# Altium PCB drv8305_instaspin_driver.PcbDoc
Units mm, origin at the board's own origin, x right, y up, seen from the top; angles counter-clockwise.
Board outline 46 x 25 mm, 2 copper layers (Top Layer, Bottom Layer), stack 1.571 mm thick; 95 components, 87 nets, 391 pads, 181 vias.
Unrouted connection lines stored in the file: 1.
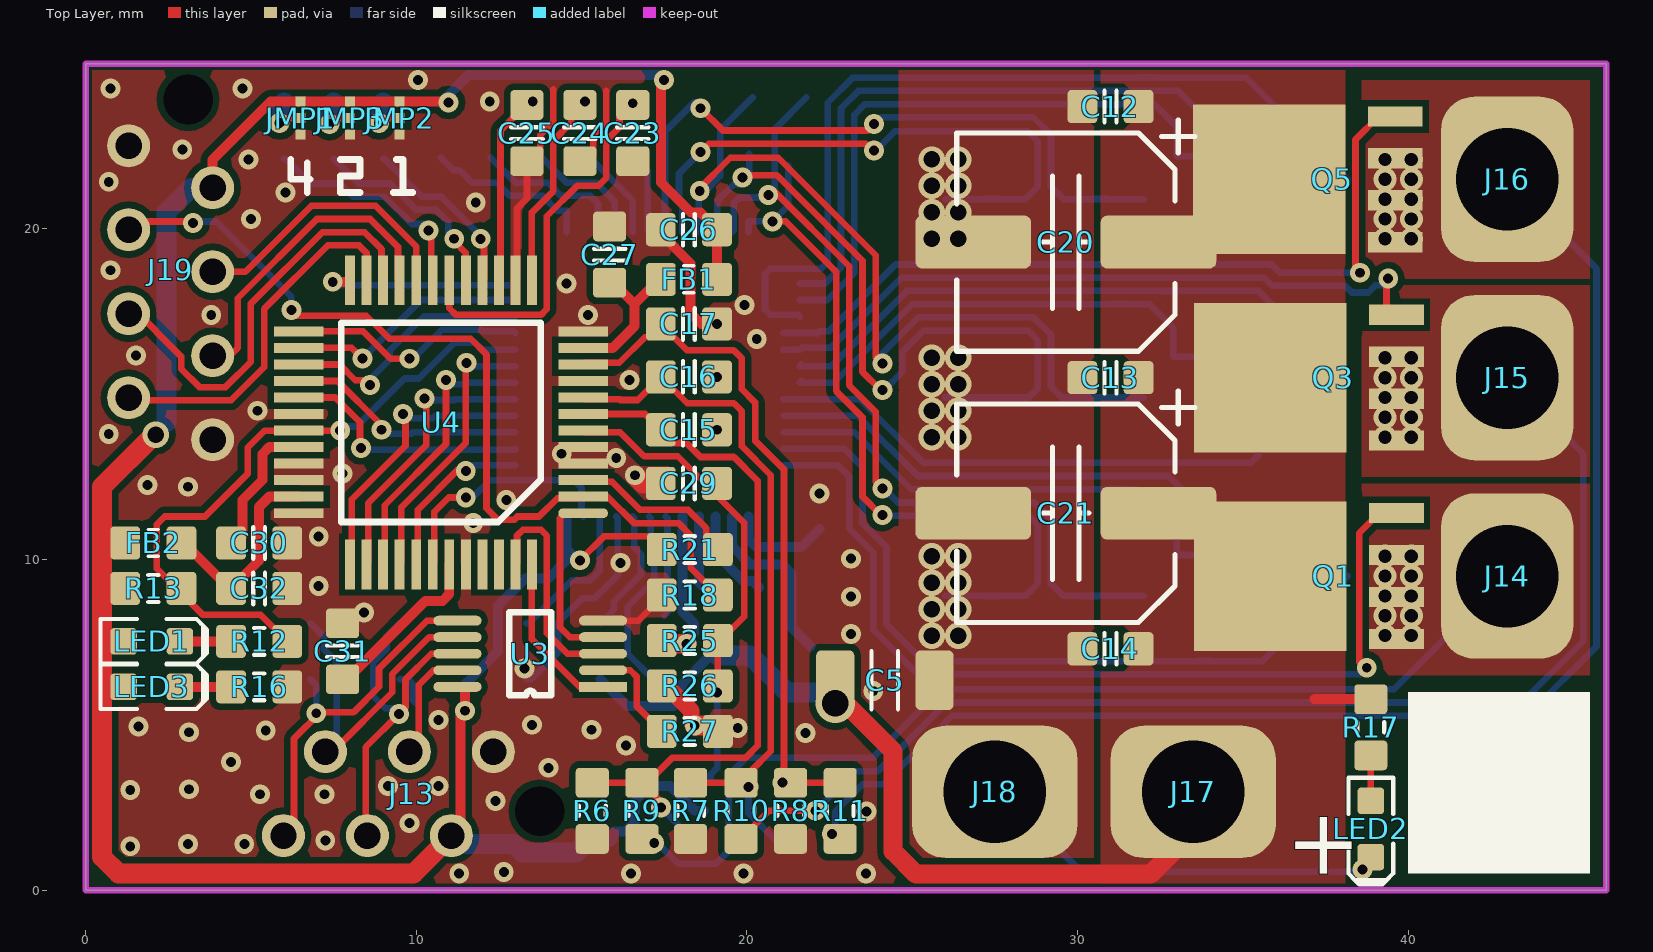
[diagram p0: Top Layer view]
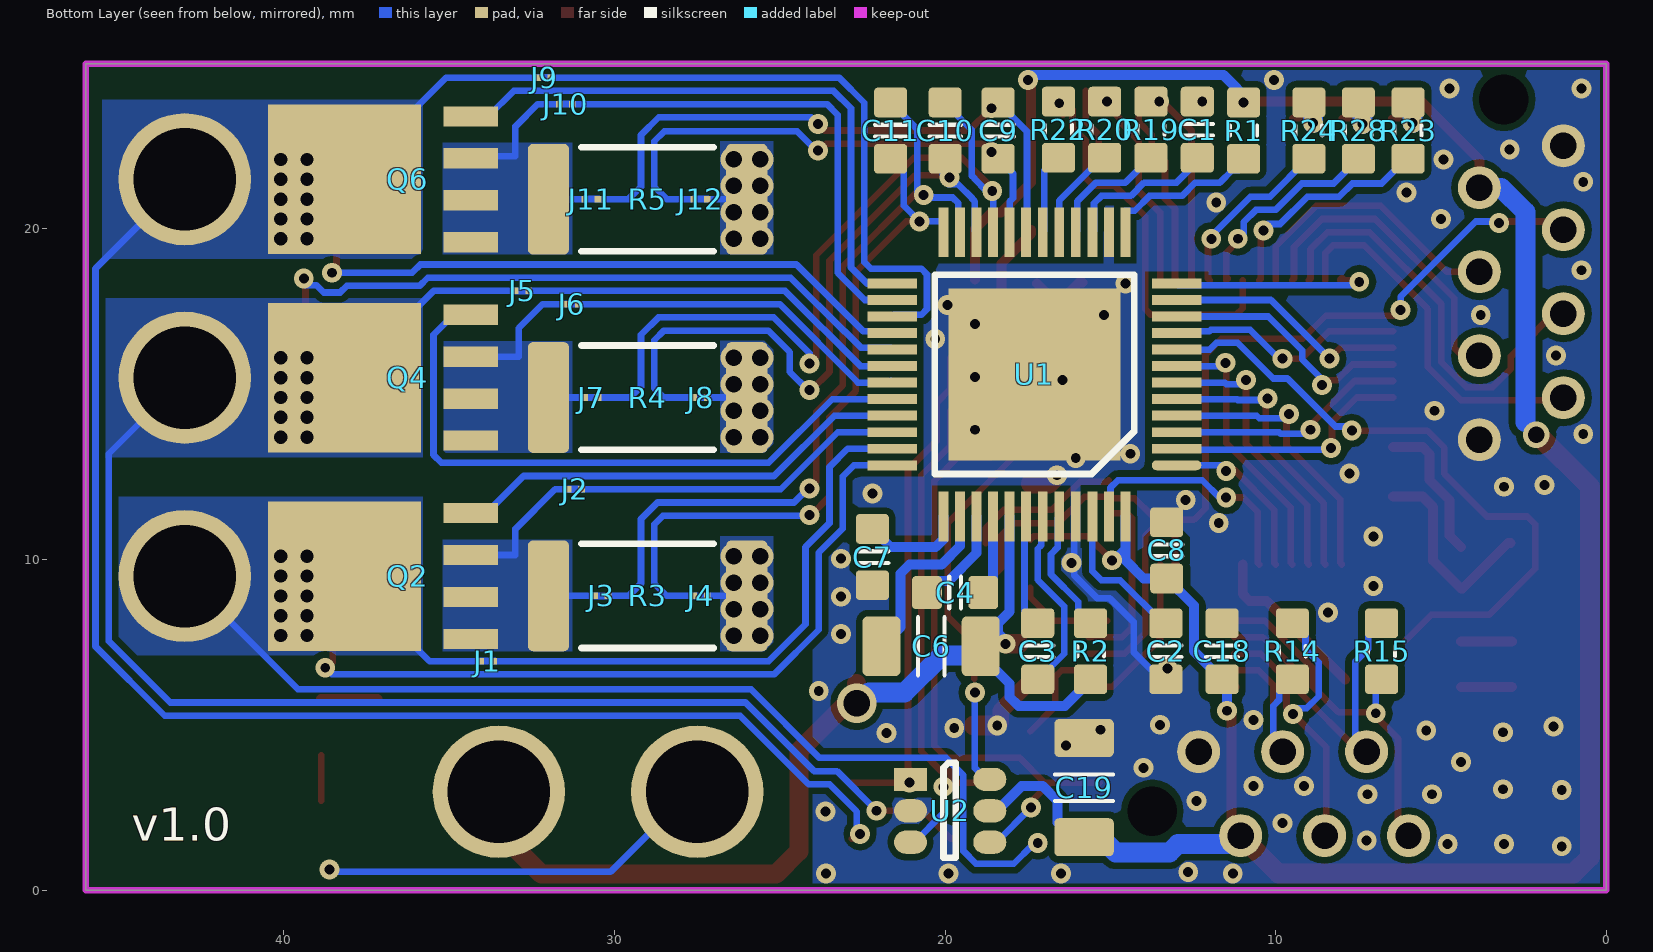
[diagram p1: Bottom Layer view, seen from below]

## Layer stack, top to bottom
Top Solder: solder mask 0.0102, Solder Resist, Dk 3.5
Top Layer: signal copper 0.0356
Dielectric 1: dielectric 1.5, FR-4, Dk 4.8
Bottom Layer: signal copper 0.0356
Bottom Solder: solder mask 0.0102, Solder Resist, Dk 3.5

## Board outline
0,0 46,0 46,25 0,25

## Design rules (kind name [scope] priority, off if disabled: settings)
Clearance ClearanceKeepOut [All vs OnLayer('Keep-Out Layer')] p1: gap=0.1 ignorepadtopadclearanceinfootprint=FALSE
Clearance [All] p2: gap=0.2 ignorepadtopadclearanceinfootprint=FALSE
ComponentClearance NetTieClearance [HasFootprint('NET-TIE-0602')] p1: gap=0 collisioncheckmode=3 verticalgap=0 showdistances=FALSE
ComponentClearance [All] p2: gap=0.2 collisioncheckmode=3 verticalgap=0.2 showdistances=FALSE
DiffPairsRouting [All] p1: maxlimit=0.3 minlimit=0.2 mostfreqgap=0.2 toplayer_minwidth=0.2 toplayer_maxwidth=1 toplayer_prefwidth=0.3 bottomlayer_minwidth=0.2 bottomlayer_maxwidth=1 bottomlayer_prefwidth=0.3 maxuncoupledlength=12.7
HoleSize [All] p1: absolutevalues=TRUE maxlimit=5 minlimit=0.3 maxpercent=80.000 minpercent=20.000
HoleToHoleClearance [All] p1: gap=0.2 allowstackedmicrovias=TRUE
MinimumSolderMaskSliver [All] p1: minsoldermaskwidth=0.2
PolygonConnect DirectConnectPolygons [All vs IsNamedPolygon('Power 16V') or IsNamedPolygon('Power GND') or IsNamedPolygon('Driver 16V') or InNet('SL_A') or InNet('SL_B') or InNet('SL_C') or InNet('MOT_A') or InNet('MOT_B') or InNet('MOT_C') or InNet('BAT_GND') or InNet('16V') or InNet('SLA_SHUNT') or InNet('SLB_SHUNT') or InNet('SLC_SHUNT')] p1: connectstyle=Direct reliefconductorwidth=0.254 reliefentries=4 polygonreliefangle="90 Angle" airgapwidth=0.254
PolygonConnect [All] p2: connectstyle=Relief reliefconductorwidth=0.254 reliefentries=4 polygonreliefangle="90 Angle" airgapwidth=0.254
RoomDefinition drv8305_instaspin_driver [InComponentClass('drv8305_instaspin_driver')] p1: confinementstyle=ConfineIn formatcopy=TRUE lockcomponents=FALSE outline -26,-25.5 75.3,-25.5 75.3,42.2 -26,42.2
RoutingVias [All] p1: holewidth=0.3 width=0.6 viastyle="Through Hole" minholewidth=0.3 minwidth=0.6 maxholewidth=2 maxwidth=3
SolderMaskExpansion SolderMaskExpansionVia [IsVia And (Not IsTestpoint)] p1: expansion=-5
SolderMaskExpansion [All] p2: expansion=0.1
Width [All] p1: maxlimit=5 minlimit=0.2 preferedwidth=0.2 minimp=50.000000 maximp=50.000000 favimp=50.000000
25 further rules are at their usual default settings.

## Classes and differential pairs
differential pair A_ISENSE: +A_ISENSE_P -A_ISENSE_N
differential pair B_ISENSE: +B_ISENSE_P -B_ISENSE_N
differential pair C_ISENSE: +C_ISENSE_P -C_ISENSE_N

## Components (designator, comment, footprint, x,y, rotation, side; value= is the part's Value field where it differs from the comment)
C1 "1u" CAPC1608X90N 12.375,23 r270 bottom value=1µ
C2 "1u" CAPC1608X90N 13.325,7.225 r90 bottom value=1µ
C3 "47n 50V" CAPC1608X90N 17.2,7.225 r90 bottom value=1µ
C4 "47n 50V" CAPC1608X90N 19.7,9 r180 bottom value=1µ
C5 "4.7u" CAPC3216X180N 24.175,6.35 r180 top value=47u
C6 "2.2u" CAPC3216X180N 20.425,7.375 r180 bottom value=47u
C7 "1u" CAPC1608X90N 22.2,10.075 r90 bottom value=1µ
C8 "1u" CAPC1608X90N 13.3,10.275 r270 bottom value=1µ
C9 "1n" CAPC1608X90N 18.4,22.975 r270 bottom value=1µ
C10 "1n" CAPC1608X90N 20,22.975 r270 bottom value=1µ
C11 "1n" CAPC1608X90N 21.65,22.975 r270 bottom value=1µ
C12 "1u" CAPC1608X90N 31,23.7 r180 top value=1µ
C13 "1u" CAPC1608X90N 31,15.5 r180 top value=1µ
C14 "1u" CAPC1608X90N 31,7.3 r180 top value=1µ
C15 "100n" CAPC1608X90N 18.25,13.925 r0 top value=1µ
C16 "100n" CAPC1608X90N 18.25,15.525 r0 top value=1µ
C17 "100n" CAPC1608X90N 18.25,17.125 r0 top value=1µ
C18 "100n" CAPC1608X90N 11.625,7.225 r90 bottom value=1µ
C19 "10u" CAPC3216X180N 15.8,3.1 r90 bottom value=1µ
C20 "220µ" CAP_ELEC_6.3x4.2 29.65,19.6 r0 top
C21 "220µ" CAP_ELEC_6.3x4.2 29.65,11.4 r0 top
C23 "2.2n" CAPC1608X90N 16.55,22.9 r270 top value=1µ
C24 "2.2n" CAPC1608X90N 14.95,22.9 r270 top value=1µ
C25 "2.2n" CAPC1608X90N 13.35,22.9 r270 top value=1µ
C26 "2.2u" CAPC1608X90N 18.25,19.975 r0 top value=1µ
C27 "2.2u" CAPC1608X90N 15.85,19.225 r90 top value=1µ
C29 "100n" CAPC1608X90N 18.25,12.3 r180 top value=1µ
C30 "2.2u" CAPC1608X90N 5.25,10.5 r0 top value=1µ
C31 "2.2u" CAPC1608X90N 7.775,7.225 r90 top value=1µ
C32 "2.2u" CAPC1608X90N 5.25,9.125 r0 top value=1µ
FB1 "220ohm" INDC1608N 18.25,18.475 r0 top value="120R @ 100 MHz"
FB2 "60ohm" INDC1608N 2.05,10.5 r180 top value="120R @ 100 MHz"
J1 "Net-Tie" NET-TIE-0602 33.85,6.925 r0 bottom net-tie
J2 "Net-Tie" NET-TIE-0602 31.2,12.125 r0 bottom net-tie
J3 "Net-Tie" NET-TIE-0602 30.4,8.9 r0 bottom net-tie
J4 "Net-Tie" NET-TIE-0602 27.4,8.9 r180 bottom net-tie
J5 "Net-Tie" NET-TIE-0602 32.8,18.125 r0 bottom net-tie
J6 "Net-Tie" NET-TIE-0602 31.3,17.725 r0 bottom net-tie
J7 "Net-Tie" NET-TIE-0602 30.7,14.9 r0 bottom net-tie
J8 "Net-Tie" NET-TIE-0602 27.4,14.9 r180 bottom net-tie
J9 "Net-Tie" NET-TIE-0602 32.125,24.575 r0 bottom net-tie
J10 "Net-Tie" NET-TIE-0602 31.475,23.775 r0 bottom net-tie
J11 "Net-Tie" NET-TIE-0602 30.7,20.9 r0 bottom net-tie
J12 "Net-Tie" NET-TIE-0602 27.4,20.9 r180 bottom net-tie
J13 "RS485" MICRO-MATCH-6 12.335,4.19 r0 top
J14 "HEADER-1" 2MM-BANANA-VIA-BOTTOM-PAD 43,9.5 r270 bottom
J15 "HEADER-1" 2MM-BANANA-VIA-BOTTOM-PAD 43,15.5 r270 bottom
J16 "HEADER-1" 2MM-BANANA-VIA-BOTTOM-PAD 43,21.5 r270 bottom
J17 "HEADER-1" 2MM-BANANA-VIA-BOTTOM-PAD 33.5,2.975 r180 bottom
J18 "HEADER-1" 2MM-BANANA-VIA-BOTTOM-PAD 27.5,2.975 r180 bottom
J19 "JTAG" MICRO-MATCH-8 1.3,22.515 r90 top
JMP1 "JUMPER" JUMPER-SMD-3WAY-0303 6.5,23.35 r90 top
JMP2 "JUMPER" JUMPER-SMD-3WAY-0303 9.5,23.35 r90 top
JMP3 "JUMPER" JUMPER-SMD-3WAY-0303 8,23.35 r90 top
LED1 "LED Orange" LED-0603-GREEN 2,7.525 r0 top
LED2 "LED White" LED-0603-GREEN 38.875,1.85 r270 top
LED3 "LED White" LED-0603-GREEN 2,6.15 r0 top
Q1 "MOSFET-N" SOT669 37,9.5 r180 top
Q2 "MOSFET-N" SOT669 37,9.5 r0 bottom
Q3 "MOSFET-N" SOT669 37,15.5 r180 top
Q4 "MOSFET-N" SOT669 37,15.5 r0 bottom
Q5 "MOSFET-N" SOT669 36.968,21.5 r180 top
Q6 "MOSFET-N" SOT669 37,21.5 r0 bottom
R1 "10k" RESC1608X55N 10.975,22.975 r270 bottom value=1K5
R2 "100R" RESC1608X55N 15.6,7.225 r270 bottom value=1K5
R3 "0.01R" RESC6332X70N 29,8.9 r180 bottom value=3K3
R4 "0.01R" RESC6332X70N 29,14.9 r180 bottom value=3K3
R5 "0.01R" RESC6332X70N 29,20.9 r180 bottom value=3K3
R6 "4.99k" RESC1608X55N 15.325,2.4 r90 top value=1K5
R7 "4.99k" RESC1608X55N 18.3,2.4 r90 top value=1K5
R8 "4.99k" RESC1608X55N 21.325,2.4 r90 top value=1K5
R9 "34.8k" RESC1608X55N 16.825,2.4 r270 top value=1K5
R10 "34.8k" RESC1608X55N 19.825,2.4 r270 top value=1K5
R11 "34.8k" RESC1608X55N 22.825,2.4 r270 top value=1K5
R12 "1k" RESC1608X55N 5.25,7.525 r0 top value=1K5
R13 "10k" RESC1608X55N 2.05,9.125 r0 top value=1K5
R14 "120R" RESC1608X55N 9.5,7.225 r90 bottom value=1K5
R15 "120R" RESC1608X55N 6.8,7.225 r270 bottom value=1K5
R16 "330R" RESC1608X55N 5.25,6.15 r180 top value=1K5
R17 "10k" RESC1608X55N 38.875,4.925 r90 top value=1K5
R18 "2.2k" RESC1608X55N 18.275,8.925 r0 top value=1K5
R19 "56R" RESC1608X55N 13.775,23 r270 bottom value=1K5
R20 "56R" RESC1608X55N 15.175,23 r270 bottom value=1K5
R21 "2.2k" RESC1608X55N 18.275,10.3 r180 top value=1K5
R22 "56R" RESC1608X55N 16.575,23 r270 bottom value=1K5
R23 "10k" RESC1608X55N 6,22.975 r270 bottom value=1K5
R24 "10k" RESC1608X55N 9,22.975 r270 bottom value=1K5
R25 "34.8k" RESC1608X55N 18.275,7.55 r180 top value=1K5
R26 "4.99k" RESC1608X55N 18.275,6.175 r0 top value=1K5
R27 "10k" RESC1608X55N 18.275,4.8 r0 top value=1K5
R28 "10k" RESC1608X55N 7.5,22.975 r270 bottom value=1K5
U1 "DRV8305N" PQFP48_PAD 13,12.85 r0 bottom
U2 "NUP4201MR6" TSOP-6 21.05,3.35 r180 bottom
U3 "SN65HVD73" SOP10 15.65,6.15 r180 top
U4 "TMS320F28027F" PQFP48 15.05,11.4 r180 top locked

## Footprints (in the part's own frame and the unit in brackets; to place one, negate y for a bottom-side part, rotate by r counter-clockwise, add the part's x,y. Pads: shape width x height; smd on the part's side, far side on the other; paste and mask are expansions set on the pad)
2MM-BANANA-VIA-BOTTOM-PAD [mm]
  rrect50% 5x4 smd far side: 1(0,0)
  round 4 hole 3.1: 1(0,0)
  body extent -2,-2 2,2, height 1.51
CAP_ELEC_6.3x4.2 [mm] "Capacitor, polarized, aluminum can; 6.3x4.2mm DxH"
  round 0.508 on Mech15: 0(0,0)
  rrect25% 3.5x1.6 smd: 1(2.8,0) 2(-2.8,0)
  silkscreen extent -3.3,-3.3 3.9,3.7, body extent -3.3,-3.3 3.3,3.3, height 4.23
CAPC1608X90N [mm] "Chip Capacitor, Body 1.6x0.8mm, EIA 0603, IPC Medium Density"
  round 0.254 on Mech15: 0(0,0)
  rrect25% 0.9x1 smd: 1(-0.85,0) 2(0.85,0)
  Top Layer pour cut-out: -0.6,0.5 -0.4,0.7 0.4,0.7 0.6,0.5 0.6,-0.5 0.4,-0.7 -0.4,-0.7 -0.6,-0.5
  silkscreen extent -0.18,-0.48 0.18,0.48, body extent -0.85,-0.45 0.85,0.45, height 0.89
CAPC3216X180N [mm] "Chip Capacitor, Body 3.2x1.6mm, 1.8mm H, EIA 1206, IPC Medium Density"
  round 0.508 on Mech15: 0(0,0)
  rrect25% 1.15x1.8 smd: 1(-1.5,0) 2(1.5,0)
  silkscreen extent -0.4,-0.88 0.4,0.88, body extent -1.7,-0.9 1.7,0.9, height 1.8
INDC1608N [mm] "Chip bead, Body 1.6x0.8mm, 0603, IPC Medium Density"
  round 0.254 on Mech15: 0(0,0)
  rrect25% 0.9x1 smd: 1(-0.85,0) 2(0.85,0)
  Top Layer pour cut-out: -0.4,0.6 0.4,0.6 0.4,-0.6 -0.4,-0.6
  silkscreen extent -0.15,-0.41 0.15,0.41, body extent -0.8,-0.4 0.8,0.4, height 0.79
JUMPER-SMD-3WAY-0303 [mm]
  rect 0.3x0.3 smd: 1(-0.5,0) 2(0,0) 3(0.5,0)
LED-0603-GREEN [mm]
  round 0.254 on Mech15: 0(0,0)
  rrect25% 0.8x0.8 smd: A(-0.85,0) K(0.85,0)
  Top Layer pour cut-out: -0.5,0.5 0.5,0.5 0.5,-0.5 -0.5,-0.5
  silkscreen extent -1.55,-0.67 1.68,0.67, body extent -0.8,-0.4 0.8,0.4, height 0.75
MICRO-MATCH-6 [mm]
  round 1.3 hole 0.8: 1(0,0) 2(-1.27,-2.54) 3(-2.54,0) 4(-3.81,-2.54) 5(-5.08,0) 6(-6.35,-2.54)
  round 0 hole 1.5 unplated: drill(1.4,-1.8)
  body extent -7.95,-3.77 1.6,1.23, height 4
MICRO-MATCH-8 [mm]
  round 1.3 hole 0.8: 1(0,0) 2(-1.27,-2.54) 3(-2.54,0) 4(-3.81,-2.54) 5(-5.08,0) 6(-6.35,-2.54) 7(-7.62,0) 8(-8.89,-2.54)
  round 0 hole 1.5 unplated: drill(1.4,-1.8)
  body extent -10.49,-3.77 1.6,1.23, height 4
NET-TIE-0602 [mm]
  rect 0.2x0.2 smd paste-0.15 mask-0.15: 1(-0.2,0) 2(0.2,0)
  Top Layer region: -0.25,-0.1 -0.25,0.1 0.25,0.1 0.25,-0.1
PQFP48 [mm]
  oval 1.5x0.3 smd: 1(0,0)
  rect 1.5x0.3 smd: 2(0,-0.5) 3(0,-1) 4(0,-1.5) 5(0,-2) 6(0,-2.5) 7(0,-3) 8(0,-3.5) 9(0,-4) 10(0,-4.5) 11(0,-5) 12(0,-5.5) 25(8.6,-5.5) 26(8.6,-5) 27(8.6,-4.5) 28(8.6,-4) 29(8.6,-3.5) 30(8.6,-3) 31(8.6,-2.5) 32(8.6,-2) 33(8.6,-1.5) 34(8.6,-1) 35(8.6,-0.5) 36(8.6,0)
  rect 0.3x1.5 smd: 13(1.55,-7.05) 14(2.05,-7.05) 15(2.55,-7.05) 16(3.05,-7.05) 17(3.55,-7.05) 18(4.05,-7.05) 19(4.55,-7.05) 20(5.05,-7.05) 21(5.55,-7.05) 22(6.05,-7.05) 23(6.55,-7.05) 24(7.05,-7.05) 37(7.05,1.55) 38(6.55,1.55) 39(6.05,1.55) 40(5.55,1.55) 41(5.05,1.55) 42(4.55,1.55) 43(4.05,1.55) 44(3.55,1.55) 45(3.05,1.55) 46(2.55,1.55) 47(2.05,1.55) 48(1.55,1.55)
  silkscreen extent 1.28,-5.76 7.31,0.27, body extent -0.27,-7.32 8.87,1.82, height 1.62
PQFP48_PAD [mm]
  oval 1.5x0.3 smd: 1(0,0)
  rect 1.5x0.3 smd: 2(0,-0.5) 3(0,-1) 4(0,-1.5) 5(0,-2) 6(0,-2.5) 7(0,-3) 8(0,-3.5) 9(0,-4) 10(0,-4.5) 11(0,-5) 12(0,-5.5) 25(8.6,-5.5) 26(8.6,-5) 27(8.6,-4.5) 28(8.6,-4) 29(8.6,-3.5) 30(8.6,-3) 31(8.6,-2.5) 32(8.6,-2) 33(8.6,-1.5) 34(8.6,-1) 35(8.6,-0.5) 36(8.6,0)
  rect 0.3x1.5 smd: 13(1.55,-7.05) 14(2.05,-7.05) 15(2.55,-7.05) 16(3.05,-7.05) 17(3.55,-7.05) 18(4.05,-7.05) 19(4.55,-7.05) 20(5.05,-7.05) 21(5.55,-7.05) 22(6.05,-7.05) 23(6.55,-7.05) 24(7.05,-7.05) 37(7.05,1.55) 38(6.55,1.55) 39(6.05,1.55) 40(5.55,1.55) 41(5.05,1.55) 42(4.55,1.55) 43(4.05,1.55) 44(3.55,1.55) 45(3.05,1.55) 46(2.55,1.55) 47(2.05,1.55) 48(1.55,1.55)
  rect 5.2x5.2 smd: 49(4.3,-2.75)
  silkscreen extent 1.28,-5.76 7.31,0.27, body extent -0.27,-7.33 8.87,1.82, height 1.62
RESC1608X55N [mm] "Chip Resistor, Body 1.6x0.8mm, EIA 0603, IPC Medium Density"
  round 0.254 on Mech15: 0(0,0)
  rrect25% 0.9x1 smd: 1(-0.85,0) 2(0.85,0)
  Top Layer pour cut-out: -0.6,0.5 -0.4,0.7 0.4,0.7 0.6,0.5 0.6,-0.5 0.4,-0.7 -0.4,-0.7 -0.6,-0.5
  silkscreen extent -0.15,-0.41 0.15,0.41, body extent -0.87,-0.47 0.88,0.48, height 0.54
RESC6332X70N [mm] "Chip Resistor, Body 6.3x3.2mm, 2512, IPC Medium Density"
  round 1 on Mech15: 0(0,0)
  rrect25% 1.25x3.35 smd: 1(-3,0) 2(3,0)
  silkscreen extent -2,-1.58 2,1.58, body extent -3.3,-1.7 3.3,1.7, height 0.69
SOP10 [mm]
  rect 1.45x0.3 smd: 1(0,0)
  oval 1.45x0.3 smd: 2(0,-0.5) 3(0,-1) 4(0,-1.5) 5(0,-2) 6(4.4,-2) 7(4.4,-1.5) 8(4.4,-1) 9(4.4,-0.5) 10(4.4,0)
  silkscreen extent 1.56,-2.25 2.84,0.25, body extent -0.27,-2.5 4.63,0.5, height 1.15
SOT669 [mil]
  rect 182x178 smd: D(46,0)
  rect 65x24 smd: G(-104.33,-75) S(-104.33,75) S(-104.33,-25) S(-104.33,25)
  body extent -125,-99 135,97, height 43
TSOP-6 [mm]
  rect 1x0.7 smd: 1(0,0)
  oval 1x0.7 smd: 2(0,-0.95) 3(0,-1.9) 4(2.4,-1.9) 5(2.4,-0.95) 6(2.4,0)
  silkscreen extent 1,-2.38 1.38,0.5, body extent -0.12,-2.45 2.58,0.55, height 1

## Part data
C1 C2 C3 C4 C7 C8 C9 C10 C11 C12 C13 C14 C15 C16 C17 C18 C19 C23 C24 C25 C26 C27 C29 C30 C31 C32: library part CAPC_1u_0603_X7R_16V_10%, "Capacitor SMD Cer 1uF 10% 16V X7R 0603", Manufacturer 1="TDK Corporation", Manufacturer Part Number 1=C1608X7R1C105K, Package / Case="0603 (1608 metric)", Ratings="16V; X7R", Supplier Part Number 1=445-1604-1-ND, Tolerance=±10%, ComponentLink1Description=http://product.tdk.com/capacitor/mlcc/en/documents/mlcc_commercial_general_en.pdf, ComponentLink1URL=http://product.tdk.com/capacitor/mlcc/en/documents/mlcc_commercial_general_en.pdf, Material=ceramic, SCDType=spec, Supplier 1=Digi-Key
C5 C6: library part CAPC_6n8_1206_NP0_50V, "Capacitor SMD Cer 6.8nF 5% 50V NP0 1206", Manufacturer 1="TDK Corporation", Manufacturer Part Number 1=C3216C0G1H682J/0.60, Package / Case="1206 (3216 metric)", Ratings="50V; NP0", Supplier Part Number 1=445-4005-1-ND, Tolerance=±5%, Material="Ceramic NP0", SCDType=spec, Supplier 1=Digi-Key
C20 C21: library part CAPE_470u_16V_THT, "Capacitor THT Alum Elec 470uF 20% 16V", Manufacturer 1=NICHICON, Manufacturer 2=JD, Manufacturer Part Number 1=UHM1C471MPD6, Manufacturer Part Number 2=GT470UF16V_10x12mm, Package / Case=Radial, Ratings="16V; 105°C", Supplier Part Number 1=54K8151, Tolerance=±20%, Material="Al Electrolytic", SCDType=undef, Supplier 1=Newark
FB1 FB2: library part FERRITE_120R-100MHz_0603, "Ferrite bead 120 Ohm at 100 MHz 2A 0603 SMD", Current=900mA, Current Rating=2A, DC Resistance (DCR)="172.9 mOhm Max", Frequency - Self Resonant=23MHz, Frequency - Test=100kHz, Impedance @ Frequency="120 Ohm @ 100MHz", Manufacturer 1="Murata Electronics North America", Manufacturer Part Number 1=BLM18PG121SN1D, Operating Temperature="-40°C ~ 105°C", Package / Case="1210 (3225 Metric)", Ratings="2 A; 50 mO DC", Supplier Part Number 1=490-1037-1-ND, Applications="Power Supplies", ComponentLink1Description=http://www.yuden.co.jp/ut/product/pdf/wound02_e.pdf, ComponentLink1URL=http://www.yuden.co.jp/ut/product/pdf/wound02_e.pdf, ComponentLink2Description=http://search.murata.co.jp/Ceramy/image/img/PDF/ENG/L0110S0100BLM18P.pdf, ComponentLink2URL=http://search.murata.co.jp/Ceramy/image/img/PDF/ENG/L0110S0100BLM18P.pdf, Current - Saturation=900mA, Current - Temperature Rise=900mA, Filter Type="Differential Mode - Single", Height (Max)="0.037\" (0.95mm)", Mounting Type="Surface Mount", Number of Lines=1, SCDType=source, Size / Dimension="0.063\" L x 0.031\" W (1.60mm x 0.80mm)", Supplier 1=Digi-Key
J13: library part HEADER-6
J19: library part HEADER-8
JMP1 JMP2 JMP3: library part JUMPER-SMD-3WAY
LED1 LED2 LED3: library part LED_SMD_Green_0603_525nm_350mcd, "LED 0603 SMD Green 525nm 350mcd 20mA", Color=Green, Current - Test=20mA, Manufacturer 1=Kingbright, Manufacturer 2="Kingbright Company LLC", Manufacturer Part Number 1=APT1608ZGCK, Manufacturer Part Number 2=APT1608-WAP24, Package / Case="0603 (1608 metric)", Ratings="200mcd min; 350 mcd typ @ 20mA", Supplier Part Number 1=604-APT1608ZGCK, Voltage - Forward (Vf) @ 10mA=3.1V, Voltage - Forward (Vf) @ 20mA=3.3V, ComponentLink1Description=http://www.mouser.com/ds/2/216/APT1608ZGCK-262051.pdf, ComponentLink1URL=http://www.mouser.com/ds/2/216/APT1608ZGCK-262051.pdf, ComponentLink2Description="APT1608-WAP24 Datasheet", ComponentLink2URL="\\SVFI2\PBLShare\Eng\Electrical Engineering\Hardware\Altium\Libraries and Templates\Unreleased Components\Part Number Request 2013-10-02\APT1608-WAP24(Ver.1B).pdf", Lens Style/Size="Rectangle with Flat Top, 1.2mm x 0.8mm", Material=InGaN, SCDType=source, Supplier 1=Mouser, Viewing Angle=120°
R1 R2 R6 R7 R8 R9 R10 R11 R12 R13 R14 R15 R16 R17 R18 R19 R20 R21 R22 R23 R24 R25 R26 R27 R28: library part RES_1K5_0603_5%, "Resistor SMD chip 1.5k Ohm 0.1W 5% 0603", Manufacturer 1=Yageo, Manufacturer Part Number 1=RC0603JR-071K5L, Package / Case="0603 (1608 metric)", Ratings="1/10 W", Supplier Part Number 1=311-1.5KGRCT-ND, Tolerance=±5%, Material="thick film", SCDType=spec, Supplier 1=Digi-Key
R3 R4 R5: library part RES_3K3_2512_5%, "Resistor SMD chip 3.3k Ohm 1W 5% 2512", Manufacturer 1=Vishay/Dale, Manufacturer Part Number 1=CRCW25123K30JNEG, Package / Case="2512 (6332 metric)", Ratings=1W, Supplier Part Number 1=541-3.3KXCT-ND, Tolerance=±5%, Material="Thick Film", SCDType=spec, Supplier 1=Digi-Key
U1: library part DRV8305
U3: library part SN65HVD3086E
Q1 Q2 Q3 Q4 Q5 Q6: PROD_ID=IC-08089

## Via types
v1: diameter 0.6, hole 0.3, Top Layer to Bottom Layer, 125 vias
v2: diameter 0.7, hole 0.4, Top Layer to Bottom Layer, 30 vias
v3: diameter 0.8, hole 0.5, Top Layer to Bottom Layer, 25 vias
v4: diameter 1.2, hole 0.8, Top Layer to Bottom Layer, 1 vias

## Nets (pads, with @x,y where several pads share a name; then routed paths per layer and width w, separated by ;. In a path a pad name is that pad's centre, name@x,y a point inside that pad or via, vN(x,y) a via of type N, cw(c..) or ccw(c..) an arc to the next point about the centre after c; other vN are vias at no path point)
3.3V: C8.2 C18.1 C19.1 C26.2 FB1.2 FB2.2 J13.2 J19.2 JMP1.3 JMP2.3 JMP3.3 LED1.A LED3.A R1.1 R13.1 R21.2 U1.48 U2.5 U3.10 | length 81.2
  Top Layer w0.2: v1(14.951,9.975) 15.675,10.7 17.325,10.7 R21.2@17.425,10.6
  Top Layer w0.3: J19.2 3.84,22.091 5.599,23.85 6.137,23.85 JMP1.3 JMP3.3 JMP2.3 10.95,23.85 v1(10.975,23.825) ; J13.2 11,1.65 11.335,1.985 11.335,5.285 v1(11.475,5.425) 11.475,6.15 U3.10 ; v1(17.491,24.5) 17.4,24.409 17.4,21.408 18.308,20.5 18.6,20.5 19.1,20 C26.2 FB1.2
  Top Layer w0.6: v3(2.125,13.776) 2.076,13.776 0.5,12.2 0.5,1 1,0.5 9.915,0.5 J13.2
  Bottom Layer w0.2: 14.55,10.376 v1(14.951,9.975)
  Bottom Layer w0.3: v1(10.975,23.825) 10.75,23.825 11.575,24.65 17.516,24.65 v1@17.516,24.5 ; v1@11.35,5.425 v1(11.475,5.425) 11.475,6.225 C18.1 12.475,7.225 12.475,8.604 C8.2@13.298,9.427 ; C8.2 14,9.425 14.55,9.975 14.55,10.376 ; 14.55,10.376 U1.48 ; C19.1 15.975,1.775 16.325,1.775 16.6,2.05 16.6,2.7 17.05,3.15 17.686,3.15 18.436,2.4 U2.5 U2.5@18.7,2.4
  Bottom Layer w0.6: 2.45,14.15 2.45,20.507 3.188,21.245 J19.2@3.74,21.245 ; J13.2 11.081,1.65 11.331,1.4 12.957,1.4 13.217,1.14 14.84,1.14 15.3,1.6 C19.1
16V: C5.2 C6.2 C12.1 C13.1 C14.1 C20.1 C21.1 J17.1 Q1.D Q3.D Q5.D R2.2 R17.2 R25.2 U1.41 | length 32.4
  Top Layer w0.3: 37.175,5.775 R17.2
  Top Layer w0.575: C5.2@22.675,6.25 22.675,5.95 24.425,4.2 24.425,1.275 ; 24.425,1.175 25.112,0.487 32.212,0.487 J17.1@35.15,3.425
  Top Layer w0.6: R25.2@17.775,7.45 v1(18.175,7.45)
  Bottom Layer w0.3: R2.2@15.575,6.375 16.375,5.575 17.779,5.575 18.05,5.846 18.05,6.25 18.925,7.125 C6.2 ; U1.41 18.05,9.579 18.05,8.421 18.4,8.071 18.4,7.775 v1@18.225,7.6
  Bottom Layer w0.6: C6.2@19.127,7.1 20.102,7.1 21.227,5.975 v4@22.3,5.975
  other v4: 22.675,5.65
A: J13.3 R14.1 U3.9 | length 6.2
  Top Layer w0.2: J13.3@10.075,4.595 10.075,6.203 10.522,6.65 U3.9
  Bottom Layer w0.2: R14.1 9.75,6.375 9.9,6.225 9.9,5.749 10.075,5.574 10.075,4.485 9.5,4.485 J13.3
A_ISENSE_N: C11.1 J3.1 U1.23 | length 24.8
  Top Layer w0.2: v1@20.6,21.15 20.82,21.15 23.1,18.87 23.1,15.266 23.9,14.466 23.9,12.35 v1(24.1,12.15)
  Bottom Layer w0.2: U1.23 19.6,19.95 19.6,20.774 19.776,20.95 20.5,20.95 20.6,21.05 20.85,21.05 20.85,23.025 C11.1@21.8,23.975 ; v1@24,12.25 v1@24.049,12.25 ; v1(24.1,12.15) 24.149,12.15 24.574,11.725 28.7,11.725 29.2,11.225 29.2,9.275 29.575,8.9 J3.1
  other v1: 20.65,21.025
A_ISENSE_P: C11.2 J4.1 U1.24 | length 21.4
  Top Layer w0.2: v1(20.776,20.226) 21.178,20.226 22.7,18.704 22.7,15.1 23.5,14.3 23.5,11.901 24.051,11.35 v1(24.1,11.35)
  Bottom Layer w0.2: U1.24 20.05,20.226 v1(20.776,20.226) 21.25,20.7 C11.2@21.25,21.925 ; v1(24.1,11.35) 24.125,11.325 28.534,11.325 28.8,11.059 28.8,9.275 28.425,8.9 J4.1
ADCINB1: C24.1 R20.1 U4.13 | length 6.1
  Top Layer w0.2: U4.13 13.5,20.5 14.15,21.15 14.15,22.676 14.687,23.213 14.687,23.312 C24.1@15.225,23.85
  other v1: 15.1,23.85
ADCINB3: C25.1 R19.1 U4.15 | length 6
  Top Layer w0.2: U4.15 12.55,18.5 12.55,22.975 13.325,23.75 C25.1 C25.1@13.625,23.75
  Bottom Layer w0.2: R19.1@13.625,23.85 R19.1@13.725,23.85
  other v1: 13.525,23.85
ADCINB7: C23.1 R22.1 U4.18 | length 12.6
  Top Layer w0.2: U4.18 11,17.6 11.2,17.4 13.774,17.4 13.95,17.576 13.95,20.384 14.866,21.3 15.508,21.3 15.75,21.542 15.75,22.676 16.15,23.076 16.15,23.6 16.3,23.75 C23.1 C23.1@16.725,23.75 ; C23.1@16.425,23.45 C23.1@16.725,23.75 ; C23.1@16.825,23.75 C23.1@16.725,23.75 ; C23.1@16.825,23.85 C23.1@16.725,23.75
  other v1: 16.55,23.8
AVDD: C1.2 U1.15 | length 4.7
  Bottom Layer w0.2: C1.2@12.25,22.15 13,21.4 13.984,21.4 14.384,21 15.274,21 15.5,20.774 15.5,19.95 U1.15
B: J13.4 R14.2 U3.8 | length 11.1
  Top Layer w0.2: J13.4 8.475,1.7 8.475,4.325 v1(9.475,5.325) 9.675,5.525 9.675,6.369 10.456,7.15 U3.8
  Bottom Layer w0.2: J13.4@8.2,1.975 J13.4 ; v1(9.475,5.325) 9.3,5.5 9.067,5.5 8.7,5.867 8.7,6.883 9.1,7.283 9.1,7.675 R14.2
B_ISENSE_N: C10.1 J7.1 U1.21 | length 24.4
  Top Layer w0.2: v1@18.526,21.176 19.501,22.151 20.95,22.151 23.9,19.201 23.9,16.125 v1(24.1,15.925)
  Bottom Layer w0.2: U1.21 18.55,21.152 18.526,21.176 18.776,21.176 19.1,21.5 19.1,21.517 19.2,21.617 19.2,22.076 19.2,22.574 19.2,23 C10.1@20.175,23.975 ; v1(24.1,15.925) 24.1,16.241 25.184,17.325 28.675,17.325 29.2,16.8 29.2,15.225 29.525,14.9 J7.1
  other v1: 18.576,21.151
B_ISENSE_P: C10.2 J8.1 U1.22 | length 20.2
  Top Layer w0.2: 20.175,21.625 20.911,21.625 23.5,19.036 23.5,16.174 23.5,15.676 24.051,15.125 v1(24.1,15.125)
  Bottom Layer w0.2: U1.22 19.1,19.95 19.1,20.827 19.176,20.903 19.176,20.916 19.61,21.35 19.9,21.35 19.949,21.399 C10.2@19.949,21.751 ; v1@20.074,21.651 C10.2@20.074,22.274 ; v1(24.1,15.125) 24.148,15.125 24.7,15.676 24.7,16.275 25.35,16.925 28.509,16.925 28.8,16.634 28.8,15.175 28.525,14.9 J8.1@27.65,14.9
  other v1: 19.874,21.551
BAT_GND: C1.1 C2.1 C5.1 C7.1 C8.1 C12.2 C13.2 C14.2 C15.2 C16.2 C17.2 C18.2 C19.2 C20.2 C21.2 C23.2 C24.2 C25.2 C26.1 C27.2 C29.2 C30.2 C31.2 C32.2 J4.2 J8.2 J12.2 J13.1 J18.1 J19.1 J19.8 JMP1.1 JMP2.1 JMP3.1 LED2.K R3.2 R4.2 R5.2 R6.1 R7.1 R8.1 R16.1 R18.1 R26.1 R27.2 U1.14 U1.45 U1.49 U2.2 U3.5 U4.4 U4.5 U4.9 U4.12 U4.14 U4.30 U4.33 U4.34 U4.36 U4.44 | length 41.1
  Top Layer w0.2: U4.14 13.05,18.5 13.05,20.616 13.35,20.916 C25.2 13.65,22.05 13.75,22.15 13.75,22.842 14.15,23.242 14.15,24.225 ; C24.2 15.025,22.125 15.15,22.125 15.2,22.075 15.35,22.225 15.35,22.842 15.75,23.242 15.75,24.175 ; U3.5@15.1,8.15 U3.5 16.717,8.15 17.425,8.858 R18.1@17.425,9.15
  Top Layer w0.3: C26.1 17.4,19.854 18.3,18.954 18.3,17.45 18.625,17.125 v1(19.1,17.125)
  Top Layer w0.5: R26.1@17.425,6.4 17.425,6.321 18.325,5.421 18.325,5.075 v1(18.425,4.975)
  Top Layer w0.6: v1(16.618,12.55) 16.868,12.3 C29.2 ; v1(18.425,4.975) R27.2@19.125,4.975
  Bottom Layer w0.2: C2.1 13.475,6.375 14.3,7.2 14.3,8.108 15.017,8.825 15.394,8.825 16.1,9.531 16.1,11.25 U1.45 ; R3.2 J4.2 ; R4.2 J8.2 ; R5.2 J12.2 ; J18.1@27.7,2.975 30.125,0.55 38.55,0.55 v1@38.55,0.6
  other v1: 11.3,0.5 16.5,0.5 19.9,0.5 23.6,0.5 12.65,0.55 38.625,0.625 1.35,1.325 3.1,1.4 4.8,1.4 7.25,1.5 9.8,2.025 23.625,2.375 12.4,2.7 5.275,2.9 7.225,2.9 1.35,3.025 3.125,3.05 9.15,3.15 10.675,3.15 14,3.7 4.4,3.875 16.35,4.375 21.775,4.75 3.125,4.775 5.45,4.825 15.3,4.85 19.725,4.9 1.6,4.95 13.5,5 10.675,5.15 23.825,6.025 13.275,6.7 23.15,7.75 8.425,8.4 23.15,8.875 7.05,9.2 16.175,9.9 23.15,10.025 7.05,10.7 11.725,11.1 12.725,11.8 22.2,12 3.1,12.2 1.875,12.25 7.775,12.6 16.05,13.075 14.4,13.2 0.7,13.8 19.1,13.925 5.2,14.5 16.45,15.425 19.1,15.525 1.525,16.175 20.3,16.675 3.8,17.4 15.2,17.4 19.925,17.7 14.55,18.35 0.75,18.75 5,20.3 11.8,20.8 6.05,21.1 0.7,21.425 4.925,22.1 2.925,22.4 12.225,23.85 0.75,24.25 4.75,24.25 10.05,24.5
  other v3: 25.6,7.7 26.4,7.7 25.6,8.5 26.4,8.5 25.6,9.3 26.4,9.3 25.6,10.1 26.4,10.1 25.6,13.7 26.4,13.7 25.6,14.5 26.4,14.5 25.6,15.3 26.4,15.3 25.6,16.1 26.4,16.1 25.6,19.7 26.4,19.7 25.6,20.5 26.4,20.5 25.6,21.3 26.4,21.3 25.6,22.1 26.4,22.1
C_ISENSE_N: C9.1 J11.1 U1.19 | length 18.5
  Top Layer w0.2: v1(18.6,23.65) 19.275,22.975 23.601,22.975 23.65,22.975 v1(23.85,23.175)
  Bottom Layer w0.2: U1.19 17.525,19.925 17.525,22.95 C9.1 ; v1(23.85,23.175) 24.05,23.375 28.666,23.375 29.2,22.841 29.2,21.275 29.575,20.9 30.4,20.9
C_ISENSE_P: C9.2 J12.1 U1.20 | length 16.2
  Top Layer w0.2: v1(18.6,22.325) 18.85,22.575 23.601,22.575 23.801,22.375 v1(23.85,22.375)
  Bottom Layer w0.2: U1.20 18.05,20.825 17.95,20.925 17.95,21.675 v1(18.6,22.325) ; v1(23.85,22.375) 23.899,22.375 24.474,22.95 28.5,22.95 28.8,22.65 28.8,21.275 28.425,20.9 J12.1
CP1H: C3.1 U1.43 | length 5.6
  Bottom Layer w0.2: U1.43 17.1,11.25 17.1,10.426 17.2,10.326 17.2,9.931 17.2,9.383 16.4,8.583 16.4,7.15 C3.1@17.175,6.375
CP1L: C3.2 U1.42 | length 3.1
  Bottom Layer w0.2: C3.2@17.5,8.3 17.6,8.4 17.6,9.765 17.6,11.25 U1.42
CP2H: C4.1 U1.39 | length 2.9
  Bottom Layer w0.3: U1.39 19.05,10.193 19.893,9.35 20.175,9.35 C4.1@20.375,9.15
CP2L: C4.2 U1.40 | length 2.4
  Bottom Layer w0.3: U1.40 18.55,9.3 C4.2
DC_V_FB: C29.1 R25.1 R26.2 U2.6 U4.6 | length 13.9
  Top Layer w0.2: U4.6 15.1,13.85 16.167,13.85 16.892,13.125 17.908,13.125 19.925,11.108 19.925,8.275 19.288,7.638 19.125,7.638 R26.2@19.125,6.4
  Bottom Layer w0.2: U2.6@18.9,3.35 18.9,3.489 19.1,3.689 v1(19.1,5.975)
DE: U3.3 U4.47 | length 6.8
  Top Layer w0.2: U4.47 13.05,9.9 13.05,10.724 13.226,10.9 13.774,10.9 13.95,10.724 13.95,7.775 14.575,7.15 U3.3
DVDD: C2.2 U1.46 | length 4.5
  Bottom Layer w0.2: C2.2 13.408,8.075 14.708,9.375 15.274,9.375 15.55,9.651 15.55,9.726 ; 15.551,9.727 U1.46@15.551,11.3
EN_GATE: U1.1 U4.41 | length 5.4
  Top Layer w0.2: U4.41 10.05,9.9 10.05,11.508 11.268,12.726 v1@11.701,12.726
  Bottom Layer w0.2: v1@11.501,12.751 11.6,12.85 U1.1
  other v1: 11.501,12.676
FAULT: R12.2 R13.2 U1.8 U4.31 | length 19.8
  Top Layer w0.2: R12.2 5.3,8.325 3.55,8.325 2.15,9.725 2.15,11.058 2.392,11.3 3.612,11.3 4.9,12.588 4.9,13.381 5.419,13.9 U4.31 7.65,13.9 v1@7.7,13.85
  Bottom Layer w0.2: v1@7.7,14.025 8.199,14.025 9.649,15.475 10.076,15.475 11.152,16.551 11.799,16.551 12,16.35 U1.8
  other v1: 7.7,13.9
GH_A: Q1.G U1.36 | length 28.3
  Top Layer w0.2: v1(38.752,6.726) 38.7,6.726 38.525,6.901 38.525,10.8 39.13,11.405 Q1.G
  Bottom Layer w0.2: U1.36@21.1,12.85 U1.36 22.762,12.85 23.1,12.512 23.1,10.934 23.825,10.209 23.825,7.875 25.175,6.525 25.55,6.525 38.55,6.525 38.525,6.55 38.701,6.726 v1(38.752,6.726)
GH_B: Q3.G U1.29 | length 20.5
  Top Layer w0.2: v1@39.35,18.3 39.35,17.705 Q3.G
  Bottom Layer w0.2: U1.29@21.1,16.35 U1.29 21.65,16.4 22.55,16.4 22.55,16.41 23.05,16.91 23.06,16.91 24.675,18.525 25.075,18.525 35.65,18.525 35.9,18.275 38.101,18.275 38.301,18.075 38.799,18.075 39.023,18.3 v1@39.35,18.3
  other v1: 39.4,18.5
GH_C: Q5.G U1.28 | length 24
  Top Layer w0.2: v1(38.55,18.675) 38.411,18.814 38.411,22.7 39.116,23.405 Q5.G
  Bottom Layer w0.2: U1.28@21.1,16.85 U1.28 22.15,16.85 22.2,16.9 22.474,16.9 24.499,18.925 24.931,18.925 35.875,18.925 36.125,18.675 v1(38.55,18.675)
GL_A: Q2.G U1.33 | length 14.5
  Bottom Layer w0.2: U1.33@21.1,14.35 U1.33 23.352,14.35 25.177,12.525 32.75,12.525 33.87,11.405 Q2.G
GL_B: Q4.G U1.32 | length 20.3
  Bottom Layer w0.2: U1.32@21.1,14.85 U1.32 23.417,14.85 25.342,12.925 35.235,12.925 35.476,13.166 35.476,16.8 34.87,17.405 Q4.G
GL_C: Q6.G U1.25 | length 18.3
  Bottom Layer w0.2: U1.25 22.366,18.35 22.85,18.834 22.85,23.65 23.375,24.175 33.05,24.175 33.82,23.405 Q6.G
IA_FB: R19.2 U1.16 | length 3.8
  Bottom Layer w0.2: R19.2@13.725,22.15 13.8,22.15 14.55,21.4 15.44,21.4 16,20.84 16,19.95 U1.16
IB_FB: R20.2 U1.17 | length 2.8
  Bottom Layer w0.2: R20.2@15.225,22.15 15.256,22.15 16.55,20.856 U1.17
IC_FB: R22.2 U1.18 | length 2.4
  Bottom Layer w0.2: R22.2@16.725,22.15 16.875,22 16.875,21.9 17,21.775 17,19.95 U1.18
ID0: R24.2 U4.16 | length 5.3
  Top Layer w0.2: U4.16 12.05,18.5 v1@12.05,19.7
  Bottom Layer w0.2: R24.2 9.025,22.125 10.175,20.975 10.764,20.975 11.95,19.789 v1(11.95,19.7)
ID1: R28.2 U4.17 | length 6.3
  Top Layer w0.2: v1(11.149,19.702) 11.149,19.625 11.5,19.274 U4.17 U4.17@11.45,18.5
  Bottom Layer w0.2: R28.2 8.25,21.375 9.209,21.375 10.009,20.575 10.598,20.575 10.974,20.199 10.974,19.877 v1(11.149,19.702)
ID2: R23.2 U4.19 | length 6.8
  Top Layer w0.2: v1(10.374,19.951) 10.45,19.875 10.45,18.5 U4.19
  Bottom Layer w0.2: R23.2 6.05,22.125 6.8,21.375 7.684,21.375 8.084,20.975 9.044,20.975 9.869,20.15 10.25,20.15 v1@10.4,20
MOT_A: J1.2 J14.1 Q1.S Q2.D R9.2 | length 36.1
  Bottom Layer w0.2: v1@17.313,1.313 17.362,1.363 17.925,0.8 19.069,0.8 19.45,1.181 19.45,3.474 19.976,4 23.8,4 25.875,6.075 28.784,6.075 39.575,6.075 J14.1@43,9.5 ; J1.2 35.593,6.925 Q2.D
  other v1: 17.2,1.425
  other v2: 39.3,7.7 40.1,7.7 39.3,8.3 40.1,8.3 39.3,8.9 40.1,8.9 39.3,9.5 40.1,9.5 39.3,10.1 40.1,10.1
MOT_B: J5.2 J15.1 Q3.S Q4.D R10.2 | length 43.1
  Top Layer w0.2: R10.2 20.675,2.4 v1(22.076,2.4)
  Bottom Layer w0.2: v1(22.076,2.4) 23.276,3.6 23.966,3.6 26.041,5.675 28.618,5.675 43.44,5.675 45.3,7.535 45.3,13.2 J15.1@43,15.5 ; J5.2 35.475,18.125 38.1,15.5 Q4.D
  other v2: 39.3,13.7 40.1,13.7 39.3,14.3 40.1,14.3 39.3,14.9 40.1,14.9 39.3,15.5 40.1,15.5 39.3,16.1 40.1,16.1
MOT_C: J9.2 J16.1 Q5.S Q6.D R11.2 | length 48.4
  Top Layer w0.2: R11.2@22.625,1.725 22.65,1.725 R11.2
  Bottom Layer w0.2: v1(22.575,1.7) 22.676,1.801 22.676,2.376 23.5,3.2 24.131,3.2 26.206,5.275 28.453,5.275 43.606,5.275 45.7,7.369 45.7,18.8 J16.1@43,21.5 ; J9.2 35.093,24.575 Q6.D
  other v2: 39.3,19.7 40.1,19.7 39.3,20.3 40.1,20.3 39.3,20.9 40.1,20.9 39.3,21.5 40.1,21.5 39.3,22.1 40.1,22.1
NetJMP1_2: JMP1.2 R23.1 | length 1.4
  Top Layer w0.2: v1(5.868,23.2) 6.018,23.35 JMP1.2 JMP1.2@6.475,23.325
  Bottom Layer w0.6: v1(5.868,23.2) 5.868,23.693 R23.1
NetJMP2_2: JMP2.2 R24.1 | length 1.4
  Top Layer w0.2: v1(8.875,23.2) 9.025,23.35 JMP2.2
  Bottom Layer w0.2: v1@8.975,23.35 v1@9,23.325
  Bottom Layer w0.6: v1(8.875,23.2) 8.875,23.7 R24.1
NetJMP3_2: JMP3.2 R28.1 | length 1.4
  Top Layer w0.2: v1(7.375,23.176) 7.549,23.35 JMP3.2
  Bottom Layer w0.6: v1(7.375,23.176) 7.375,23.7 R28.1
NetLED1_K: LED1.K R12.1 | length 1.6
  Top Layer w0.3: LED1.K R12.1
NetLED2_A: LED2.A R17.1 | length 1.4
  Top Layer w0.2: LED2.A R17.1
NetLED3_K: LED3.K R16.2 | length 1.6
  Top Layer w0.3: LED3.K R16.2
PWM_AH: U1.2 U4.29 | length 7.7
  Top Layer w0.2: U4.29 7.55,14.9 8.3,14.15 v1@8.3,13.35
  Bottom Layer w0.2: v1(8.325,13.375) 8.375,13.325 13,13.325 U1.2
PWM_AL: U1.3 U4.28 | length 7.4
  Top Layer w0.2: U4.28 7.616,15.4 8.925,14.091 v1@8.925,13.85
  Bottom Layer w0.2: v1(8.95,13.925) 9.074,13.801 9.849,13.801 9.898,13.85 U1.3
PWM_BH: U1.4 U4.37 | length 8.6
  Top Layer w0.2: U4.37 8.05,9.9 8.05,11.825 8.059,11.825 9.675,13.441 v1@9.675,14.3
  Bottom Layer w0.2: v1(9.6,14.401) 9.726,14.275 10.5,14.275 10.575,14.35 U1.4
PWM_BL: U1.5 U4.38 | length 8.5
  Top Layer w0.2: U4.38 8.55,9.9 8.55,11.705 10.3,13.455 v1@10.3,14.8
  Bottom Layer w0.2: v1@10.175,14.85 10.2,14.825 11.149,14.825 11.174,14.85 U1.5
  other v1: 10.25,14.875
PWM_CH: U1.6 U4.39 | length 8.5
  Top Layer w0.2: U4.39 9.05,9.9 9.05,11.639 10.9,13.489 v1@10.9,15.35
  Bottom Layer w0.2: v1@10.8,15.35 10.85,15.3 11.5,15.3 11.55,15.35 U1.6
  other v1: 10.9,15.425
PWM_CL: U1.7 U4.40 | length 8.3
  Top Layer w0.2: U4.40 9.55,9.9 9.55,11.574 11.501,13.524 v1@11.501,15.799
  Bottom Layer w0.2: v1@11.5,15.85 U1.7
  other v1: 11.525,15.95
PWRGD: R1.2 U1.13 | length 5.1
  Bottom Layer w0.2: R1.2@10.75,22.15 11.125,21.775 11.317,21.775 11.692,21.4 12.434,21.4 12.834,21 13.819,21 14.269,20.55 14.55,20.55 U1.13
RE: R27.1 U3.2 | length 3.1
  Top Layer w0.2: U3.2 16.475,6.65 16.675,6.45 16.675,5.55 R27.1
RESET: R21.1 U4.3 | length 4.8
  Top Layer w0.2: U4.3 15.1,12.35 15.925,12.35 16.775,11.5 18.225,11.5 18.775,10.95 R21.1@18.775,10.5
RX: U3.1 U4.48 | length 5
  Top Layer w0.2: U4.48 13.5,7.589 14.939,6.15 U3.1
SCLK: U1.12 U4.24 | length 6.1
  Top Layer w0.3: v1(7.475,18.4) 7.95,18.4 U4.24
  Bottom Layer w0.2: v1(7.475,18.4) 7.575,18.3 12.95,18.3 U1.12
SCS: U1.9 U4.25 | length 7.3
  Top Layer w0.2: U4.25 8.4,16.9 9.225,16.075 v1(9.8,16.075)
  Bottom Layer w0.2: v1(9.8,16.075) 9.9,16.075 10.776,16.951 11.965,16.951 12.016,16.9 12.95,16.9 U1.9
SDI: U1.10 U4.27 | length 7.9
  Top Layer w0.2: U4.27 7.681,15.9 8.156,15.425 8.45,15.425 v1(8.6,15.275)
  Bottom Layer w0.2: v1(8.6,15.275) 8.6,15.476 8.624,15.476 9.2,16.052 9.2,16.324 10.227,17.351 U1.10
SDO: U1.11 U4.26 | length 7.4
  Top Layer w0.2: U4.26 8.05,16.4 v1@8.374,16.076
  Bottom Layer w0.2: v1(8.375,16.076) 10.15,17.85 U1.11
SH_A: J1.1 U1.35 | length 17.6
  Bottom Layer w0.2: U1.35@21.1,13.35 U1.35 22.95,13.35 23.5,12.8 23.5,11.1 24.225,10.375 24.225,8.042 25.342,6.925 J1.1
SH_B: J5.1 U1.30 | length 12
  Bottom Layer w0.2: U1.30@21.65,15.9 U1.30 22.566,15.85 24.841,18.125 J5.1
SH_C: J9.1 U1.27 | length 18.9
  Bottom Layer w0.2: U1.27 21.55,17.4 20.726,17.4 20.55,17.576 20.55,18.624 20.726,18.8 22.25,18.8 22.45,19 22.45,23.816 23.209,24.575 26.325,24.575 J9.1
SL_A: J2.1 U1.34 | length 10.6
  Bottom Layer w0.2: U1.34@21.1,13.85 U1.34 23.25,13.85 24.975,12.125 29.45,12.125 J2.1
SL_B: J6.1 U1.31 | length 10.6
  Bottom Layer w0.2: U1.31@21.65,15.4 U1.31 22.644,15.35 22.644,15.362 25.006,17.725 J6.1
SL_C: J10.1 U1.26 | length 14.9
  Bottom Layer w0.2: U1.26 22.431,17.85 23.25,18.669 23.25,23.45 23.575,23.775 J10.1
SLA_SHUNT: J2.2 J3.2 Q2.S R3.1 | length 5.6
  Bottom Layer w0.2: J3.2 R3.1 ; J2.2 31.8,12.125 33,10.925 33,10.135 Q2.S@34.35,10.135
SLB_SHUNT: J6.2 J7.2 Q4.S R4.1 | length 5.1
  Bottom Layer w0.2: J7.2 R4.1 ; J6.2 32.175,17.725 32.9,17 32.9,16.135 Q4.S@34.35,16.135
SLC_SHUNT: J10.2 J11.2 Q6.S R5.1 | length 5
  Bottom Layer w0.2: J11.2 R5.1 ; J10.2 32.325,23.775 33,23.1 33,22.2 33.9,22.2 33.965,22.135 Q6.S@34.35,22.135
TCK: J19.7 U4.23 | length 11.8
  Top Layer w0.2: J19.7@0.98,14.815 J19.7@1.68,14.815 ; J19.7@1.4,15.095 J19.7@1.68,14.815 ; U4.23 8.5,19.274 8.274,19.5 7.326,19.5 5.4,17.574 5.4,15.816 4.399,14.815 J19.7@1.68,14.815
TDI: J19.4 U4.20 | length 8.3
  Top Layer w0.2: J19.4@3.99,18.705 4.834,18.705 6.829,20.7 8.771,20.7 9.986,19.486 ; U4.20 10,19.451
TDO: J19.5 U4.22 | length 12.9
  Top Layer w0.2: J19.5@1.4,17.635 2.89,16.145 2.89,15.772 3.446,15.215 4.233,15.215 5,15.982 5,17.739 7.161,19.9 8.44,19.9 8.95,19.39 8.95,18.5 U4.22
TMS: J19.6 U4.21 | length 9.4
  Top Layer w0.2: J19.6@3.99,16.165 4.365,16.165 4.6,16.4 4.6,17.905 6.995,20.3 8.606,20.3 9.45,19.456 9.45,18.5 U4.21
TRST: J19.3 R18.2 U4.2 | length 26.6
  Top Layer w0.2: J19.3@1.45,19.975 1.7,20.225 v1@3.425,20.225 ; v1(6.225,17.55) 6.4,17.375 8.49,17.375 9.19,16.675 11.649,16.675 12.125,16.199 12.125,15.701 12.125,11.551 12.476,11.2 12.96,11.2 13.06,11.3 13.714,11.3 14.264,11.85 15,11.85 U4.2 15.786,11.9 16.586,11.1 17.933,11.1 18.3,10.733 18.3,9.75 R18.2
  Bottom Layer w0.2: J19.3@1.4,20.102 J19.3@1.4,20.175 ; v1@3.425,20.225 3.95,20.225 6.225,17.95 v1(6.225,17.55)
  other v1: 3.25,20.176
TX: U3.4 U4.1 | length 5.5
  Top Layer w0.2: U4.1 14.5,11.4 14.35,11.25 14.35,7.95 14.65,7.65 U3.4
VA_FB: C15.1 R6.2 R9.1 U2.4 U4.7 | length 22.3
  Top Layer w0.2: U4.7 16.925,14.4 C15.1 17.8,13.525 18.175,13.525 18.6,13.1 19.608,13.1 20.325,12.383 20.325,4.367 19.958,4 17.742,4 16.992,3.25 R9.1 ; R6.2 R9.1 ; v1(17.4,2.5) 17.4,2.675 R9.1
  Bottom Layer w0.2: v1(17.4,2.5) 18.45,1.45 U2.4 U2.4@18.7,1.45
VB_FB: C16.1 R7.2 R10.1 U2.3 U4.8 | length 21.4
  Top Layer w0.2: U4.8 15.1,14.85 16.15,14.85 16.175,14.825 16.7,14.825 C16.1 18.2,14.725 19.608,14.725 19.85,14.483 19.85,13.424 20.725,12.549 20.725,4.201 20.124,3.6 19.825,3.6 R10.1 R7.2@18.325,3.25
  Bottom Layer w0.2: v1(20.05,3.125) 20.05,2.331 20.931,1.45 U2.3 U2.3@21.1,1.45
VC_FB: C17.1 R8.2 R11.1 U2.1 U4.10 | length 20.8
  Top Layer w0.2: U4.10 15.1,15.95 16.141,15.95 16.916,16.725 17,16.725 C17.1 18.2,16.325 19.608,16.325 19.85,16.083 19.85,15.15 20.25,14.75 20.25,13.6 21.125,12.725 21.125,3.7 21,3.575 R8.2 R11.1
  other v1: 21.075,3.25
VCP_LSD: C7.2 U1.37 | length 3.2
  Bottom Layer w0.3: U1.37 20.05,10.612 20.287,10.375 21.65,10.375 C7.2
VCPH: C6.1 U1.38 | length 5.5
  Bottom Layer w0.3: U1.38 19.55,10.405 20.105,9.85 21.079,9.85 21.35,9.579 21.35,7.95 C6.1
VDD1: C30.1 U4.32 | length 4.4
  Top Layer w0.3: C30.1@4.4,10.375 4.75,10.725 4.75,11.802 5.348,12.4 5.35,12.4 5.35,13.195 5.555,13.4 U4.32
VDD2: C31.1 U4.43 | length 5.1
  Top Layer w0.3: C31.1@7.9,6.375 10.275,8.75 10.795,8.75 11,8.955 U4.43
VDDA: C27.1 FB1.1 U4.11 | length 4.4
  Top Layer w0.3: U4.11 15.945,16.4 16.6,17.055 16.6,17.725 ; C27.1 15.95,18.375 16.6,17.725 ; FB1.1@17.225,18.35 16.6,17.725
VDDIO: C32.1 FB2.1 U4.35 | length 6.2
  Top Layer w0.3: FB2.1 2.975,10.5 4.35,9.125 C32.1 4.925,9.65 4.929,9.65 5.2,9.921 5.2,9.925 5.25,9.975 5.25,11.595 5.555,11.9 U4.35
VDRAIN: R2.1 U1.44 | length 3.8
  Bottom Layer w0.2: R2.1@15.575,8.075 15.975,8.475 15.975,8.724 16.8,9.549 16.8,10.097 16.8,10.16 16.6,10.36 16.6,11.25 U1.44
WAKE: U1.47 U4.42 | length 7.4
  Top Layer w0.2: U4.42 10.55,9.9 10.55,11.442 10.983,11.876 v1(11.501,11.876)
  Bottom Layer w0.2: v1(11.501,11.876) 11.699,11.876 12.223,12.4 14.774,12.4 15,12.174 15,11.35 U1.47
Y: J13.6 R15.2 U3.6 | length 11.2
  Top Layer w0.2: J13.6 6.305,1.97 6.305,4.584 7.096,5.375 8.1,5.375 8.875,6.15 8.875,6.7 10.325,8.15 U3.6
  Bottom Layer w0.2: J13.6 J13.6@6.3,1.965 ; R15.2 6.975,6.2 v1@6.975,5.525
  other v1: 6.975,5.35
Z: J13.5 R15.1 U3.7 | length 10.4
  Top Layer w0.2: J13.5 7.255,4.405 7.41,4.25 7.541,4.25 9.275,5.984 9.275,6.534 10.391,7.65 U3.7
  Bottom Layer w0.2: R15.1 7.2,7.675 7.2,7.3 7.6,6.9 7.6,4.535 J13.5
pads on no net: C1.0 C2.0 C3.0 C4.0 C5.0 C6.0 C7.0 C8.0 C9.0 C10.0 C11.0 C12.0 C13.0 C14.0 C15.0 C16.0 C17.0 C18.0 C19.0 C20.0 C21.0 C23.0 C24.0 C25.0 C26.0 C27.0 C29.0 C30.0 C31.0 C32.0 FB1.0 FB2.0 J13.drill J19.drill LED1.0 LED2.0 LED3.0 R1.0 R2.0 R3.0 R4.0 R5.0 R6.0 R7.0 R8.0 R9.0 R10.0 R11.0 R12.0 R13.0 R14.0 R15.0 R16.0 R17.0 R18.0 R19.0 R20.0 R21.0 R22.0 R23.0 R24.0 R25.0 R26.0 R27.0 R28.0 U4.45 U4.46

## Polygon pours and split planes (outlines as drawn)
BAT_GND on Bottom Layer "GND_BOTTOM" (solid, remove dead copper, pour order 8): 24,0 0,0 0,25 24,25
BAT_GND on Bottom Layer "BAT_GND_L02_P034" (solid, pour order 34): 25.2,13.1 26.8,13.1 26.8,16.7 25.2,16.7
SLB_SHUNT on Bottom Layer "SLB_SHUNT" (solid, remove dead copper, pour order 12): 31.275,13.2 31.275,16.6 35.2,16.6 35.2,13.2
BAT_GND on Bottom Layer "BAT_GND_L02_P036" (solid, pour order 36): 25.2,7.1 25.2,10.7 26.8,10.7 26.8,7.1
BAT_GND on Bottom Layer "BAT_GND_L02_P032" (solid, pour order 32): 25.2,22.7 25.2,19.1 26.8,19.1 26.8,22.7
SLC_SHUNT on Bottom Layer "SLC_SHUNT" (solid, remove dead copper, pour order 10): 31.275,19.2 31.275,22.6 35.2,22.6 35.2,19.2
SLA_SHUNT on Bottom Layer "SLA_SHUNT" (solid, remove dead copper, pour order 14): 31.275,7.2 31.275,10.6 35.2,10.6 35.2,7.2
MOT_C on Bottom Layer "MOT_C" (solid, remove dead copper, pour order 16): 35.8,19.1 35.8,23.9 45.5,23.9 45.5,19.1
MOT_B on Bottom Layer "MOT_B" (solid, remove dead copper, pour order 18): 35.8,13.1 35.8,17.9 45.5,17.9 45.5,13.1
MOT_A on Bottom Layer "MOT_A" (solid, remove dead copper, pour order 20): 35.8,7.1 35.8,11.9 45.5,11.9 45.5,7.1
BAT_GND on Top Layer "GND_TOP" (solid, remove dead copper, pour order 30): 0,0 0,25 24,25 24,11 24.6,11 24.6,25 30.7,25 30.7,0
MOT_B on Top Layer "MOT_B" (solid, remove dead copper, pour order 24): 38.6,18.5 45.5,18.5 45.5,12.5 38.6,12.5
16V on Top Layer "Power 16V" (solid, remove dead copper, pour order 4): 30.7,-0.4 38.1,-0.4 38.1,25 30.7,25
MOT_C on Top Layer "MOT_C" (solid, remove dead copper, pour order 22): 38.6,24.5 45.5,24.5 45.5,18.5 38.6,18.5
MOT_A on Top Layer "MOT_A" (solid, remove dead copper, pour order 26): 38.6,12.5 45.5,12.5 45.5,6.5 38.6,6.5

## Keep-outs
Keep-Out Layer:
  the board outline again, w0.2

## Silkscreen, mask and mechanical layers (free items; w line width, h text height)
Top Overlay:
  rectangle: 40,0.5 45.5,6
  lines w0.2: 6.2,22.1 6.2,21.5 6.8,21.5 ; 6.7,21.1 6.7,22 ; 7.7,22.1 8.3,22.1 8.3,21.6 7.7,21.6 7.7,21.1 8.3,21.1 ; 9.3,21.1 9.9,21.1 ; 9.4,22.1 9.6,22.1 9.6,21.1
  text "+" at 36.3,0.5 h2
Bottom Overlay:
  text "v1.0" at 44.6,1.5 h1
Top Solder:
  rectangle: 38.7,7.2 40.6,10.6
  rectangle: 38.7,13.1 40.6,16.6
  rectangle: 38.7,19.1 40.6,22.6